# Altium PCB PCB1.PcbDoc
Units mm, origin at the board's own origin, x right, y up, seen from the top; angles counter-clockwise.
Board outline 66.04 x 101.73 mm, 4 copper layers (Top Layer, Int1 (GND), Int2 (PWR), Bottom Layer), stack 1.369 mm thick; 32 components, 67 nets, 162 pads, 41 vias.
Unrouted connection lines stored in the file: 46.
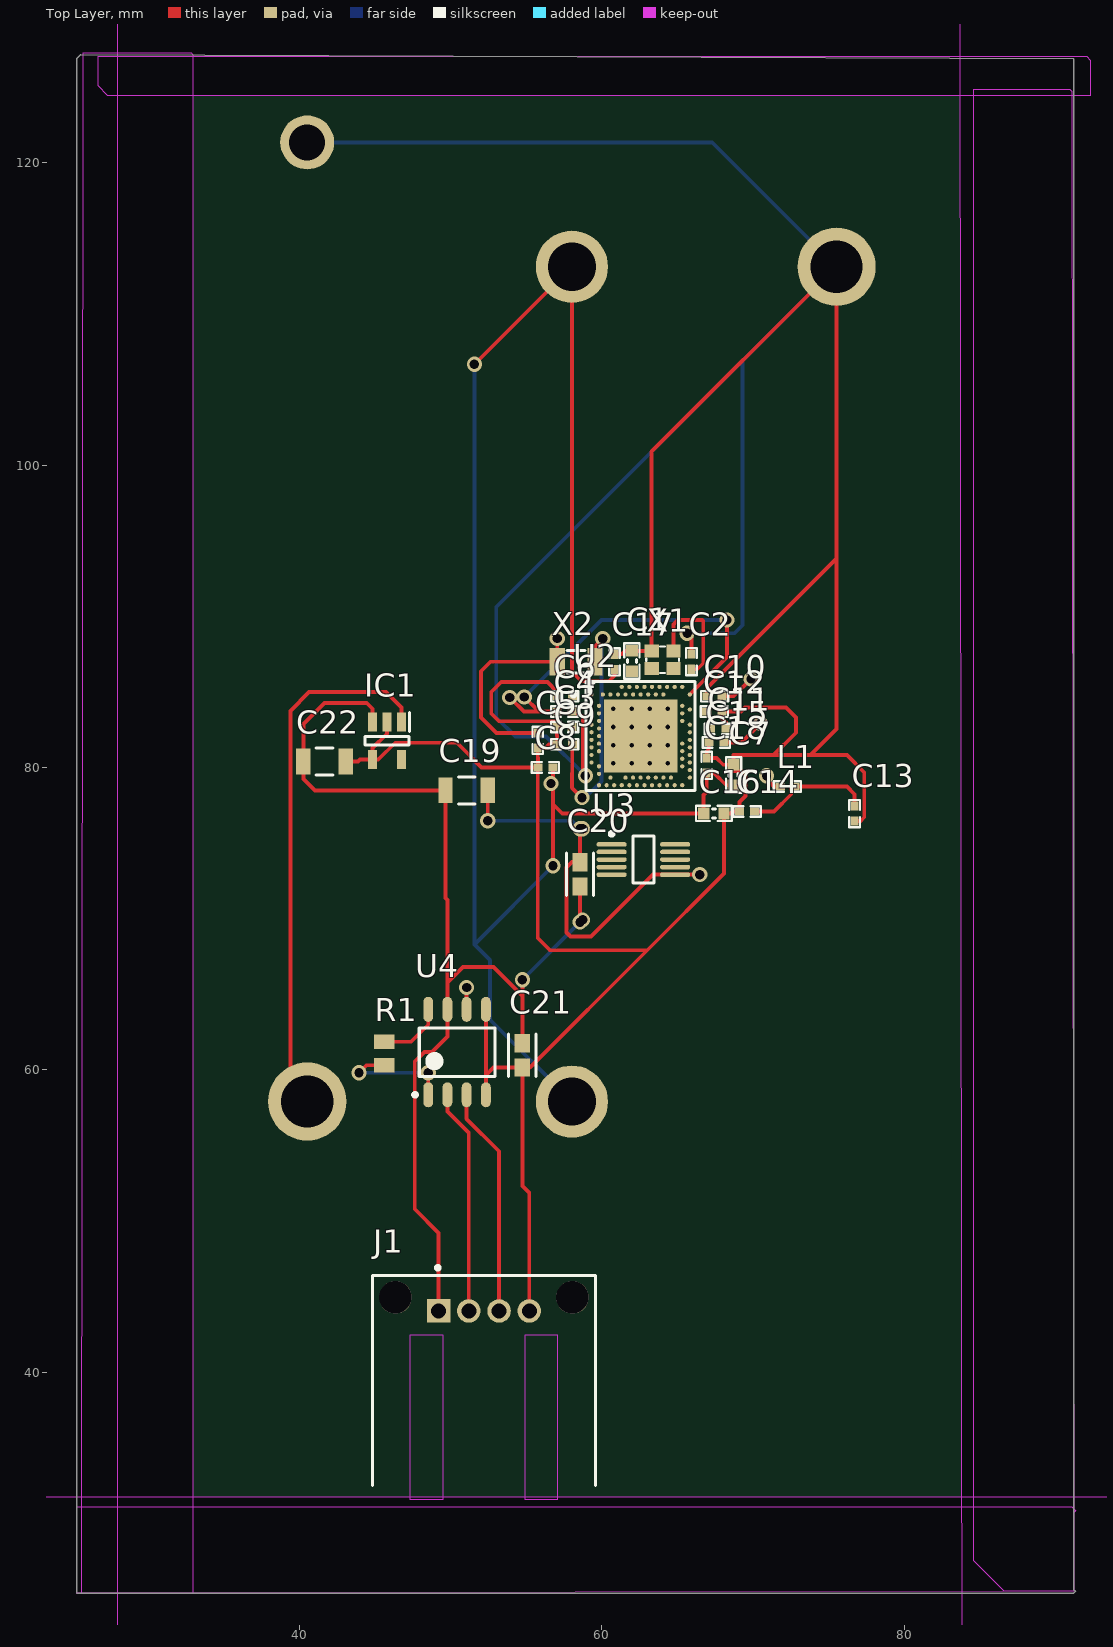
[diagram p0: Top Layer view]
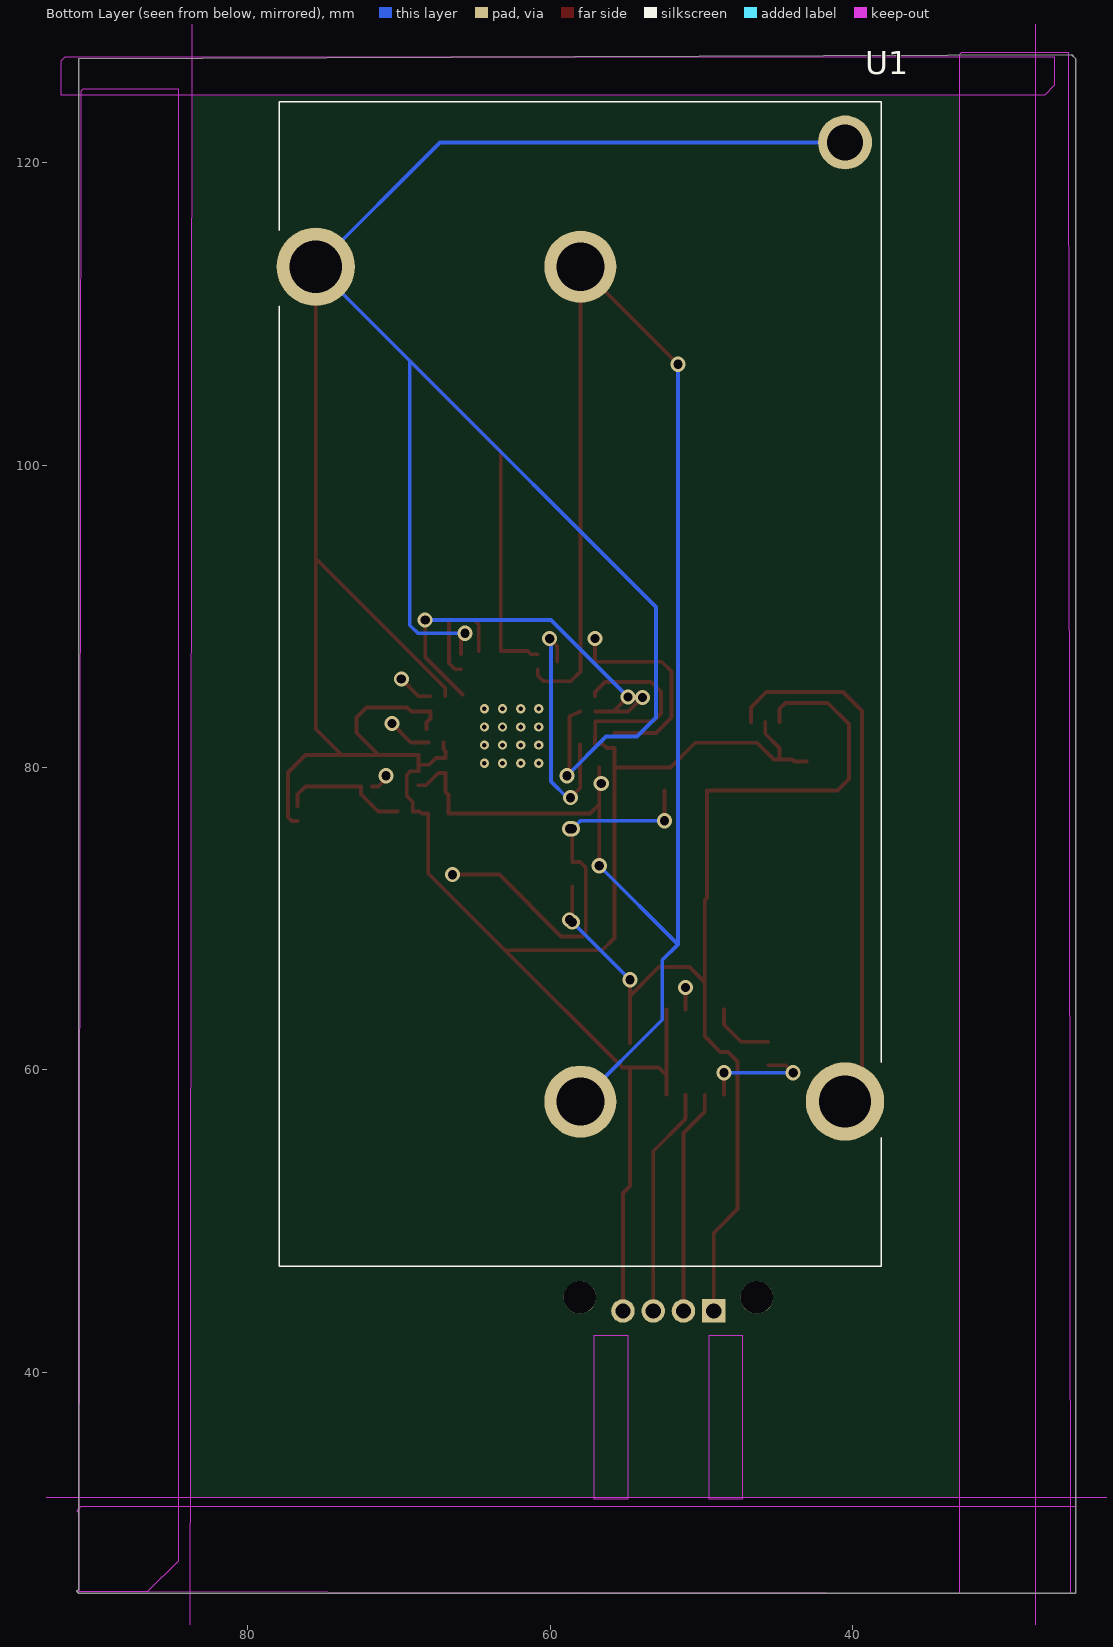
[diagram p1: Bottom Layer view, seen from below]
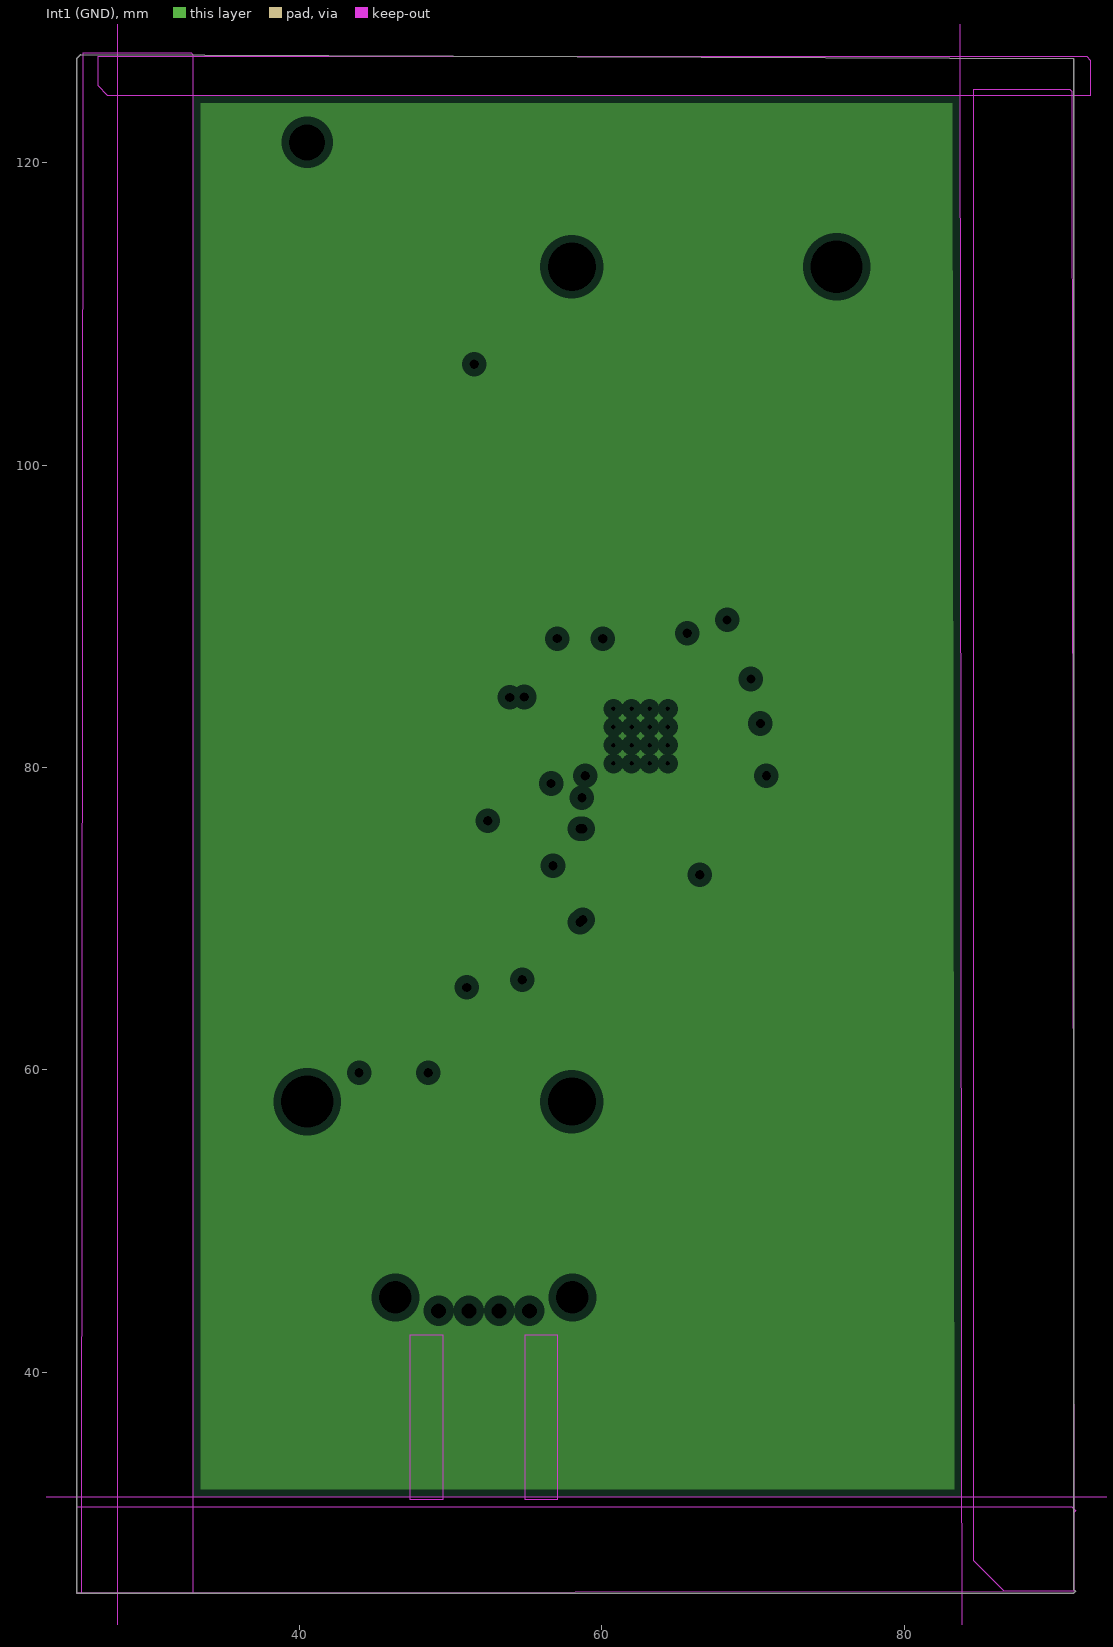
[diagram p2: Int1 (GND), clearances drawn from the general rule]
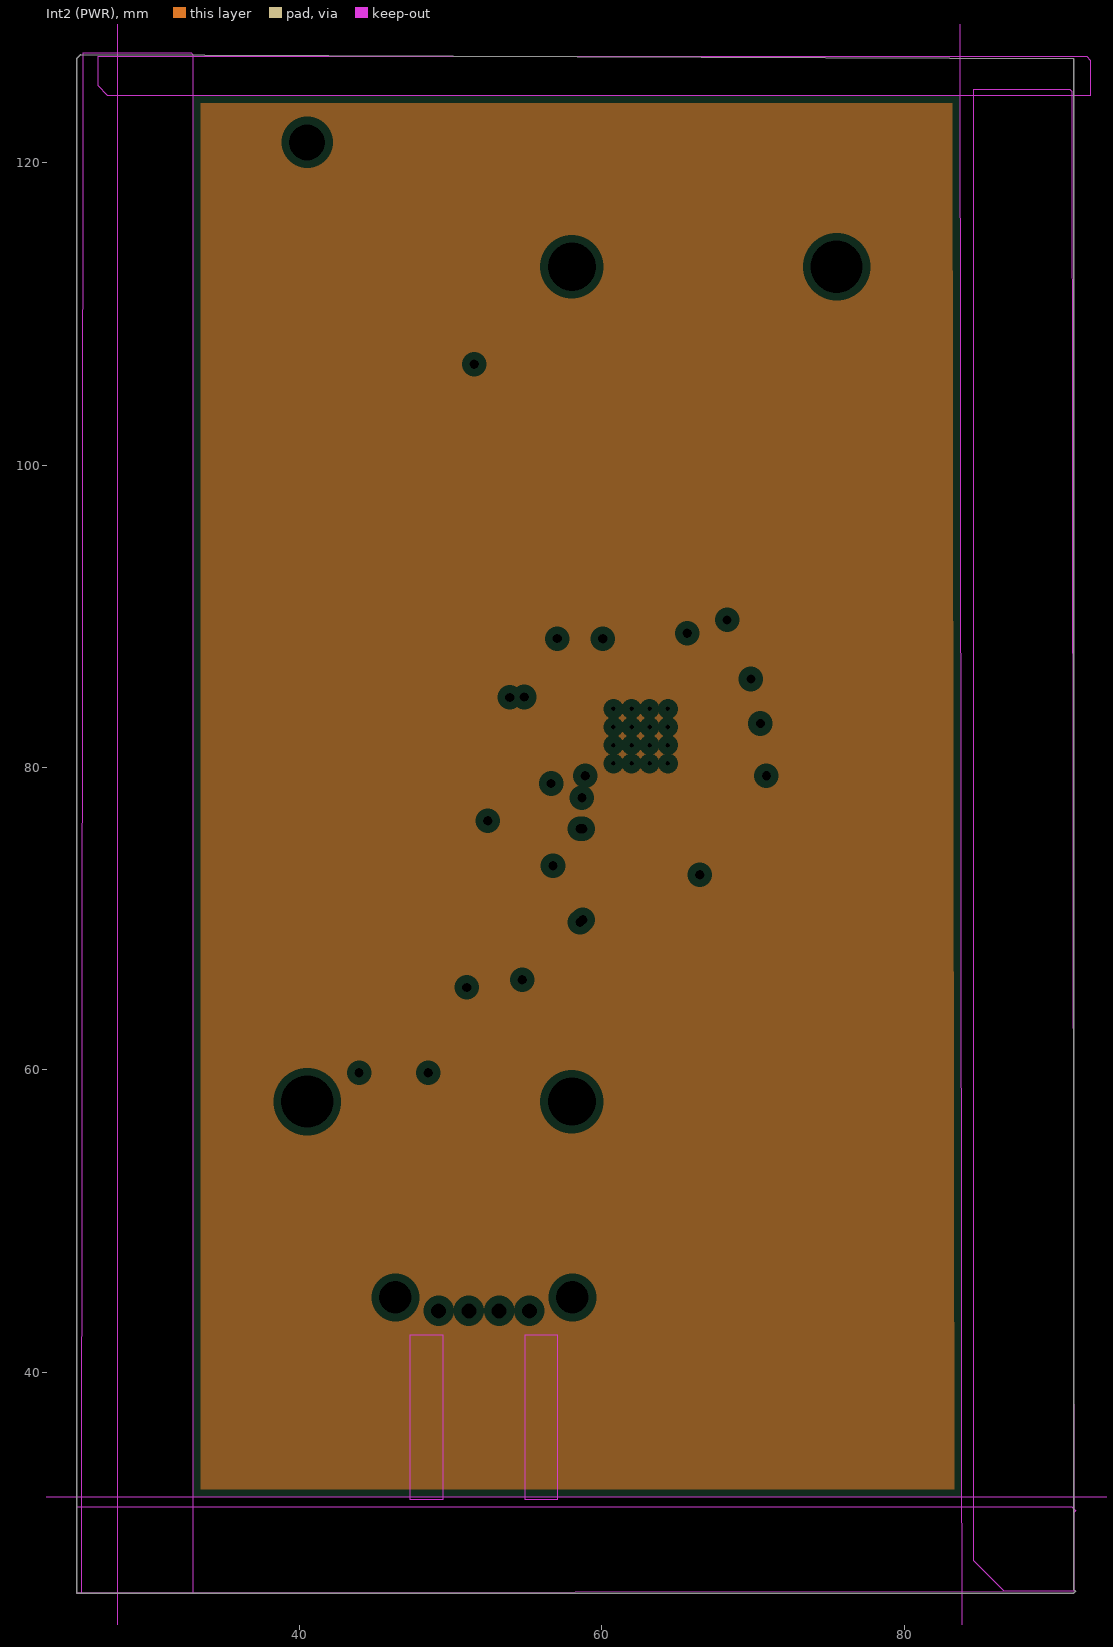
[diagram p3: Int2 (PWR), clearances drawn from the general rule]

## Layer stack, top to bottom
Top Solder: solder mask 0.0254, SM-001, Dk 4
Top Layer: signal copper 0.035
Dielectric 1: prepreg 0.1295, PP-017, Dk 4.3
Dielectric 2: prepreg 0.1295, PP-017, Dk 4.3
Int1 (GND): plane copper 0.035
Dielectric 3: core 0.7112, Core-039, Dk 4.8
Int2 (PWR): plane copper 0.035
Dielectric 4: prepreg 0.1295, PP-017, Dk 4.3
Dielectric 5: prepreg 0.1295, PP-017, Dk 4.3
Bottom Layer: signal copper 0.035
Bottom Solder: solder mask 0.0254, SM-001, Dk 4

## Board outline
91.186,126.873 91.186,25.654 91.313,25.527 91.186,25.4 25.273,25.4 25.273,126.873 25.527,127.127
cut-out: 83.693,130.746 83.82,130.874 95.377,130.874 95.377,18.224 97.79,15.811 97.663,15.684 83.82,15.684
cut-out: 17.78,18.415 99.822,18.415 98.806,19.431 98.806,31.75 18.542,31.75 17.78,32.512
cut-out: 18.034,130.175 18.923,129.286 27.94,129.286 27.94,20.447 28.575,19.812 27.813,19.05 19.939,19.05
cut-out: 25.717,127.254 32.829,127.254 32.956,127.127 32.956,25.4 25.59,25.4
cut-out: 25.273,25.4 25.273,31.115 91.059,31.115 91.313,30.861 91.186,30.734 91.186,25.527
cut-out: 91.186,25.527 86.614,25.527 84.582,27.559 84.582,124.841 90.932,124.841 91.059,124.714
cut-out: 92.329,126.746 92.075,127 26.67,127 26.67,125.095 27.305,124.46 92.329,124.46

## Design rules (kind name [scope] priority, off if disabled: settings)
Clearance [All] p1: gap=0.254 ignorepadtopadclearanceinfootprint=FALSE except(0: Arc-Hole Track-Hole SMDPad-Hole THPad-Hole Via-Hole Fill-Hole Poly-Hole Region-Hole Text-Hole)
PlaneClearance [All] p1: clearance=0.508
PlaneConnect [All] p1: planeconnectstyle=Relief reliefexpansion=0.508 reliefentries=4 reliefconductorwidth=0.254 reliefairgap=0.254
PolygonConnect [All] p1: connectstyle=Relief reliefconductorwidth=0.254 reliefentries=4 polygonreliefangle="90 Angle" airgapwidth=0.254
RoutingVias [All] p1: holewidth=0.611 width=1 viastyle="Through Hole" minholewidth=0.611 minwidth=1 maxholewidth=0.711 maxwidth=1
SolderMaskExpansion [All] p1: expansion=0.102 istentingtop=FALSE
Width [All] p1: maxlimit=0.254 minlimit=0.25 preferedwidth=0.254 minimp=50.000000 maximp=50.000000 favimp=50.000000 checkconnectedcopper=TRUE
28 further rules are at their usual default settings.

## Components (designator, comment, footprint, x,y, rotation, side; value= is the part's Value field where it differs from the comment)
C1 "1.0µF" CAPC1608X06L 61.976,87.035 r270 top
C2 "12pF" CAPC1005X04L 65.913,86.995 r90 top
C3 "N.C." CAPC1005X04L 57.531,82.677 r180 top
C4 "12pF" CAPC1005X04L 57.531,83.693 r0 top
C5 "12pF" CAPC1005X04L 55.753,81.788 r270 top
C6 "100nF" CAPC1005X04L 57.539,84.709 r180 top
C7 "1.0µF" CAPC1608X06L 68.707,79.502 r90 top
C8 "100nF" CAPC1005X04L 56.261,80.01 r180 top
C9 "12pF" CAPC1005X04L 57.539,81.534 r180 top
C10 "100pF" CAPC1005X04L 67.445,84.709 r180 top
C11 "N.C." CAPC1005X04L 67.691,82.55 r180 top
C12 "0.8pF" CAPC1005X04L 67.429,83.693 r180 top
C13 "0.5pF" CAPC1005X04L 76.708,76.954 r90 top
C14 "N.C." CAPC1005X04L 69.596,77.089 r180 top
C15 "820pF" CAPC1005X04L 67.564,81.661 r180 top
C16 "4.7µF" CAPC1608X06L 67.397,76.962 r0 top
C17 "100nF" CAPC1005X04L 60.833,86.987 r90 top
C18 "100nF" CAPC1005X04L 66.929,80.137 r90 top
C19 "0.1uF" FP-C1206C-EB-MFG 51.051,78.486 r0 top value="0.10 μF"
C20 "10uF" FP-GRM188-0_1-e0_2_0_55-IPC_A 58.547,72.938 r90 top
C21 "10uF" FP-GRM188-0_1-e0_2_0_55-IPC_A 54.737,60.96 r270 top
C22 "0.1uF" FP-C1206C-EB-MFG 41.656,80.391 r0 top value="0.10 μF"
IC1 "MAX1726EUK50+T" SOT95P280X145-5N 45.786,81.768 r270 top
J1 "34793-0040" FP-34793-0040-MFG 52.197,37.465 r0 top
L1 "4.7nH" INDC1005X04L 72.263,78.74 r0 top
R1 "303R" RESC2013X70X40LL20T20 45.593,61.087 r90 top
U1 "1047" 1047 58.013,85.512 r90 bottom
U2 "nRF52840-QIAA" AQFN50P700X700X85_HS-74N 62.559,82.078 r0 top
U3 "AD7789BRMZ" RM-10_M 62.738,73.914 r0 top
U4 "AD623ARZ" ADI-AD623ARZ-8_M 50.419,61.183 r90 top
X1 "32MHz" BT-XTAL_2016 64.008,87.122 r0 top
X2 "32.768kHz" XTAL_3215 58.293,86.995 r0 top

## Footprints (in the part's own frame and the unit in brackets; to place one, negate y for a bottom-side part, rotate by r counter-clockwise, add the part's x,y. Pads: shape width x height; smd on the part's side, far side on the other; paste and mask are expansions set on the pad)
1047 [mm]
  round 4.77 hole 3.18: 1(-27.6,0) 2(27.6,0)
  round 5.175 hole 3.45: 3(-27.6,-17.5) 4(27.6,17.5)
  round 3.57 hole 2.38: 5(35.82,-17.5)
  silkscreen extent -38.5,-19.9 38.51,19.9, body extent -38.51,-19.9 38.51,19.9, height 14.95
ADI-AD623ARZ-8_M [mm] "SOIC, 8-Leads, Body 5x4mm, Pitch 1.27mm, IPC Low Density"
  oval 1.65x0.65 smd: 1(-2.825,1.905) 2(-2.825,0.635) 3(-2.825,-0.635) 4(-2.825,-1.905) 5(2.825,-1.905) 6(2.825,-0.635) 7(2.825,0.635) 8(2.825,1.905)
  silkscreen extent -2.95,-2.5 1.6,2.9, body extent -2,-2.5 2,2.5, height 1.75
AQFN50P700X700X85_HS-74N [mm]
  rect 4.85x4.85 smd mask+0.05: 74(0,0)
  round 0.275 smd paste+0.012 mask+0.05: A8(-1.25,3.25) A10(-0.75,3.25) A12(-0.25,3.25) A14(0.25,3.25) A16(0.75,3.25) A18(1.25,3.25) A20(1.75,3.25) A22(2.25,3.25) A23(2.75,3.25) AA24(3.25,-2.25) AB2(-2.75,-2.5) AC5(-2,-2.75) AC9(-1,-2.75) AC11(-0.5,-2.75) AC13(0,-2.75) AC15(0.5,-2.75) AC17(1,-2.75) AC19(1.5,-2.75) AC21(2,-2.75) AC24(3.25,-2.75) AD2(-2.75,-3.25) AD4(-2.25,-3.25) AD6(-1.75,-3.25) AD8(-1.25,-3.25) AD10(-0.75,-3.25) AD12(-0.25,-3.25) AD14(0.25,-3.25) AD16(0.75,-3.25) AD18(1.25,-3.25) AD20(1.75,-3.25) AD22(2.25,-3.25) AD23(2.75,-3.25) B1(-3.25,2.75) B3(-2.5,2.75) B5(-2,2.75) B7(-1.5,2.75) B9(-1,2.75) B11(-0.5,2.75) B13(0,2.75) B15(0.5,2.75) B17(1,2.75) B19(1.5,2.75) B24(3.25,2.75) C1(-3.25,2.25) D2(-2.75,2) D23(2.75,2) E24(3.25,1.75) F2(-2.75,1.5) F23(2.75,1.5) G1(-3.25,1.25) H2(-2.75,1) H23(2.75,1) J1(-3.25,0.75) J24(3.25,0.75) K2(-2.75,0.5) L1(-3.25,0.25) L24(3.25,0.25) M2(-2.75,0) N1(-3.25,-0.25) N24(3.25,-0.25) P2(-2.75,-0.5) P23(2.75,-0.5) R1(-3.25,-0.75) R24(3.25,-0.75) T2(-2.75,-1) T23(2.75,-1) U1(-3.25,-1.25) U24(3.25,-1.25) V23(2.75,-1.5) W1(-3.25,-1.75) W24(3.25,-1.75) Y2(-2.75,-2) Y23(2.75,-2)
  silkscreen extent -4.56,-3.6 3.6,3.6, body extent -3.55,-3.55 3.55,3.55, height 0.85
BT-XTAL_2016 [mm]
  rect 0.95x0.85 smd: 1(-0.725,-0.575) 2(0.725,-0.575) 3(0.725,0.575) 4(-0.725,0.575)
  silkscreen extent -1.08,-0.88 1.08,0.88, body extent -1.05,-0.85 1.05,0.85, height 0.56
CAPC1005X04L [mm]
  rect 0.6x0.5 smd: 1(-0.5,0) 2(0.5,0)
  silkscreen extent -0.9,-0.35 0.9,0.35, body extent -0.51,-0.25 0.51,0.25, height 0.5
CAPC1608X06L [mm]
  rect 0.75x0.8 smd: 1(-0.675,0) 2(0.675,0)
  silkscreen extent -1.17,-0.5 1.18,0.5, body extent -0.8,-0.43 0.8,0.43, height 0.8
FP-34793-0040-MFG [mm]
  rect 1.55x1.55 hole 1 paste-1000 mask+0: 1(-3,6.6)
  round 1.55 hole 1 paste-1000 mask+0: 2(-1,6.6) 3(1,6.6) 4(3,6.6)
  round 2.15 hole 2.15 unplated paste-1000 mask+0: ""(-5.85,7.5) ""(5.85,7.5)
  Keep-Out Layer region: 2.69,-5.85 4.89,-5.85 4.89,5 2.69,5
  Keep-Out Layer region: -4.89,-5.85 -2.69,-5.85 -2.69,5 -4.89,5
  silkscreen extent -7.37,-4.95 7.37,9.57, body extent -7.47,-9.05 7.47,9.05, height 0.25
FP-C1206C-EB-MFG [mm]
  rect 0.95x1.7 smd paste+0 mask+0: 1(-1.4,0) 2(1.4,0)
  silkscreen extent -0.55,-0.9 0.55,0.9, body extent -2,-1 2,1, height 0.25
FP-GRM188-0_1-e0_2_0_55-IPC_A [mm]
  rect 1.208x1.012 smd paste+0 mask+0: 1(-0.802,0) 2(0.802,0)
  silkscreen extent -1.41,-0.91 1.41,0.91, body extent -1.91,-1.01 1.91,1.01, height 0.25
INDC1005X04L [mm]
  rect 0.65x0.5 smd: 1(-0.475,0) 2(0.475,0)
  silkscreen extent -0.9,-0.35 0.9,0.35, body extent -0.5,-0.3 0.5,0.3, height 0.5
RESC2013X70X40LL20T20 [mm] "Chip Resistor, 2-Leads, Body 2.00x1.25mm, IPC High Density"
  rect 0.95x1.35 smd: 1(-0.775,0) 2(0.775,0)
  body extent -1.1,-0.72 1.1,0.72, height 0.7
RM-10_M [mm] "TSSOP, 10-Leads, Body 3x3mm, Pitch 0.5mm, IPC Low Density"
  oval 2x0.3 smd: 1(-2.1,1) 2(-2.1,0.5) 3(-2.1,0) 4(-2.1,-0.5) 5(-2.1,-1) 6(2.1,-1) 7(2.1,-0.5) 8(2.1,0) 9(2.1,0.5) 10(2.1,1)
  silkscreen extent -2.22,-1.55 0.7,1.82, body extent -1.55,-1.55 1.55,1.55, height 1.1
SOT95P280X145-5N [mm]
  rect 1.25x0.6 smd: 1(-1.25,0.95) 2(-1.25,0) 3(-1.25,-0.95) 4(1.25,-0.95) 5(1.25,0.95)
  silkscreen extent -1.87,-1.45 0.27,1.5, body extent -1.4,-1.45 1.4,1.45, height 1.45
XTAL_3215 [mm]
  rect 1x1.8 smd: 1(-1.25,0) 2(1.25,0)
  silkscreen extent -0.6,-0.75 0.6,0.75, body extent -1.6,-0.75 1.6,0.75, height 0.81

## Part data
C1 C7: library part C0603-1µ0, "Capacitor, X7R, ±10%", Footprint Doc=0603, LatestRevisionDate=2013-06-05, Note=16V, Part Number=C0603-1µ0, Pin Count=2, Published=2009-05-08, Publisher="Nordic Semiconductor"
C2 C4 C5 C9: library part C0402-12p, "Capacitor, NP0, ±2%", Footprint Doc=0402, LatestRevisionDate=2011-05-11, Note=50V, Part Number=C0402-12p, Pin Count=2, Published=2009-05-08, Publisher="Nordic Semiconductor"
C3 C11 C14: library part C0402-N.C., "Not mounted", Assembly="Not mounted", Footprint Doc=0402, LatestRevisionDate=2009-05-08, Part Number=C0402-N.C., Pin Count=2, Published=2009-05-08, Publisher="Nordic Semiconductor"
  C14: Note="Chip Cap"
C6 C8 C17 C18: library part C0402-100n, "Capacitor, X7R, ±10%", Footprint Doc=0402, LatestRevisionDate=2009-11-23, Note=16V, Part Number=C0402-100n, Pin Count=2, Published=2009-05-08, Publisher="Nordic Semiconductor"
C10: library part C0402-100p, "Capacitor, NP0, ±5%", Footprint Doc=0402, LatestRevisionDate=2009-05-08, Note=50V, Part Number=C0402-100p, Pin Count=2, Published=2009-05-08, Publisher="Nordic Semiconductor"
C12: library part C0402-0.8p, "Capacitor, NP0, ±10%", Footprint Doc=0402, LatestRevisionDate=2012-11-21, Note=50V, Part Number=C0402-0.8p, Pin Count=2, Published=2009-05-08, Publisher="Nordic Semiconductor"
C13: library part C0402-0.5p, "Capacitor, NP0, ±10%", Footprint Doc=0402, LatestRevisionDate=2017-02-23, Note=50V, Part Number=C0402-0.5p, Pin Count=2, Published=2009-05-08, Publisher="Nordic Semiconductor"
C15: library part C0402-820p, "Capacitor, NP0, ±5%", Footprint Doc=0402, LatestRevisionDate=2009-05-08, Note=50V, Part Number=C0402-820p, Pin Count=2, Published=2009-05-08, Publisher="Nordic Semiconductor"
C16: library part C0603-4µ7-6.3V-X7R, "Capacitor, X7R, ±10%", Footprint Doc=0603, LatestRevisionDate=2015-06-10, Note=6.3V, Part Number=C0603-4µ7-6.3V-X7R, Pin Count=2, Published=2015-06-10, Publisher="Nordic Semiconductor"
C19 C22: library part CMP-03020-000153-1, "CAP CER 0.1UF 100V X7R 1206", Capacitance="0.10 μF", Manufacturer=KEMET, Manufacturer Part Number=C1206C104K1RACTU, Package=C1206C-EB, Temperature="-55°C to +150°C", Temperature Characteristic=X7R, Temperature Coefficient=15%, Temperature Range High=+150°C, Temperature Range Low=-55°C, Tolerance=0.1, Voltage Rating="100 V", Automotive=Yes, Automotive Grade="Grade 0", Category=Cap, ComponentLink2Description=Datasheet, ComponentLink2URL=https://content.kemet.com/datasheets/KEM_C1007_X8R_ULTRA_150C_SMD.pdf, Device Class L1="Passive Components", Device Class L2=Capacitors, Device Class L3="Ceramic Capacitors", Digikey Description="CAP CER 0.1UF 100V X7R 1206", Height=0.88mm, Ipc Land Pattern Name=CAPC320160X78, Lead Free=Yes, Material=Ceramic, Mouser Description="CAP CER 0.1UF 100V X7R 1206", Octopart=https://octopart.com/c1206c104k1ractu-kemet-89521, RoHS=TRUE
C20 C21: library part CMP-2006-02792-2, "Chip Multilayer Ceramic Capacitors for General Purpose, 0603, 10uF, X5R, 15%, 20%, 6.3V", Case Code (Imperial)=0603, Case Code (Metric)=1608, Dielectric=X5R, Max Operating Temperature=85°C, Min Operating Temperature=-55°C, Package Quantity=4000, Tolerance=20%, Voltage=6.3V, Capacitance=10uF, Case/Package=0603, Depth=0.8mm, Height=0.8mm, Lead Free="Lead Free", Length=1.6mm, Material=Ceramic, Mount="Surface Mount", Packaging="Tape and Reel", Radiation Hardening=No, REACH SVHC="No SVHC", Termination=SMD/SMT, Thickness=0.035inch, Voltage Rating=6.3V, Voltage Rating (DC)=6.3V, Width=0.031inch
IC1: "Integrated Circuit", Manufacturer_Name="Maxim Integrated", Mouser Part Number=700-MAX1726EUK50T, Datasheet Link=http://componentsearchengine.com/Datasheets/1/MAX1726EUK50+T.pdf, Height=1.45mm, Manufacturer_Part_Number=MAX1726EUK50+T, Mouser Price/Stock=https://www.mouser.co.uk/ProductDetail/Maxim-Integrated/MAX1726EUK50%2bT?qs=Jw2w9zrI6w%252Bbrdx6zz2S%2FQ%3D%3D
J1: library part CMP-04776-000092-1, "CONN HEADER R/A 4POS 2MM", Current Rating=4A, Manufacturer=Molex, Temperature="-40°C to +105°C", Temperature Range High=+105°C, Temperature Range Low=-40°C, Voltage Rating=500V, Automotive=No, Category=Conn, ComponentLink2Description=Datasheet, ComponentLink2URL=http://www.molex.com/webdocs/datasheets/pdf/en-us/0347930040_PCB_HEADERS.pdf, Conn Gender=Male, Conn Orientation="Right Angle", Contact Material=Tin,Nickel, Device Class L1=Connectors, Device Class L2="Headers and Wire Housings", Device Class L3=unset, Digikey Description="CONN HEADER R/A 4POS 2MM", Footprint Url=https://www.molex.com/pdm_docs/sd/347930040_sd.pdf, Height=10.02mm, Lead Free=Yes, Manufacturer Part Number=34793-0040, Mouser Description="Mini50™ Unsealed, Single Row, Right-Angle Header, 4 Circuit, Polarization Option A, Black, Tray", Number Of Contacts=4, Number Of Rows=1, Octopart=https://octopart.com/34793-0040-molex-22881898, Package=34793-0040, Pitch=2mm, RoHS=TRUE, Standoff Height=0.32mm
L1: library part L0402-4n7, "High frequency chip inductor ±5%", Footprint Doc=0402, LatestRevisionDate=2012-09-19, Note="High frequency chip inductor ±5%", Part Number=L0402-4n7, Pin Count=2, Published=2009-05-08, Publisher="Nordic Semiconductor"
R1: library part CMP-2001-00412-1, Manufacturer=Panasonic, Part Number=ERJ-6GEYJ3R0V
U1: "Undefined or Miscellaneous", Manufacturer_Name="Keystone Electronics", Mouser Part Number=534-1047, Datasheet Link=https://www.keyelco.com/product.cfm/product_id/14061, Height=14.85mm, Manufacturer_Part_Number=1047, Mouser Price/Stock=https://www.mouser.co.uk/ProductDetail/Keystone-Electronics/1047?qs=up89fPMRNqBQruBm7zqCRQ%3D%3D
U2: library part nRF52840-QIAAD0, "Multi-protocol Bluetooth Low Energy, IEEE 802.15.4, ANT and 2.4GHz proprietary system-on-chip", Manufacturer="Nordic Semiconductor", Footprint Doc=AQFN-73, LatestRevisionDate=2018-12-04, Manufacturer Part Number=nRF52840-QIAAD0, Part Number=nRF52840-QIAAD0, Pin Count=73, Published=2018-12-04, Publisher="Nordic Semiconductor"
U3: library part CMP-0313-02267-2, "Single 24-Bit Low Power Sigma-Delta Analog-to-Digital Converter with Serial, SPI Interface, 16.6SPS, -40 to +105 degC, RM-10, Pb-Free, Tube", Generic Part Number=AD7789, Housing Color=Natural, Manufacturer="Analog Devices", Manufacturer Part Number=46999-0353, Max Operating Temperature=105°C, Min Operating Temperature=-40°C, Category=Connectors, Channels=1, ComponentLink1Description="Manufacturer URL", ComponentLink1URL=http://www.analog.com/en/index.html, ComponentLink2Description=Datasheet, ComponentLink2URL=http://www.analog.com/static/imported-files/data_sheets/AD7788_7789.pdf, ComponentLink3Description="Package Specification", ComponentLink3URL=http://www.analog.com/static/imported-files/packages/PKG_PDF/MSOP%28RM%29/RM_10.pdf, ComponentLink4Description="Product URL", ComponentLink4URL=http://www.analog.com/en/analog-to-digital-converters/ad-converters/ad7789/products/product.html, ComponentLink5Description=https://datasheet.ciiva.com/30086/050291758-sd-30086280.pdf?src-supplier=Onlinecomponents.com, ComponentLink5URL=https://datasheet.ciiva.com/30086/050291758-sd-30086280.pdf?src-supplier=Onlinecomponents.com, DatasheetVersion=Rev.B, Gender=Male, Glow Wire Compliant=Compliant, Housing Material=Nylon, Interface="Ser, SPI", Length=18.6mm, Mount=Cable, Mounting Technology="Surface Mount", Number Of Contacts=4, Orientation=Straight, PackageDescription="10-Lead Mini Small Outline Package [MSOP]", PackageReference=RM-10, PackageVersion=May-2005, Packing=Tube, PartNumber=AD7789BRMZ, Pitch=3.68mm, Pricing 1="1=0,85000, 10=0,70300, 100=0,58600, 1000=0,46880, 2500=0,42485 (USD)", REACH SVHC="No SVHC", Resolution (Bits)=24, RoHS=Y, Stock 1=6500, Supplier 1=Digi-Key, Throughput Rate (SPS)=16.6
U4: library part CMP-2000-05040-1, "Single-Supply, Rail-to-Rail, Low Cost Instrumentation Amplifier, 800 KHz, -40 to 85 degC, 8-Pin SOIC, RoHS, Tube", Current - Input Bias=17nA, Current - Output / Channel=-, Current - Supply=375µA, Manufacturer="Analog Devices", Operating Temperature=-40degC~85degC, Package / Case="8-SOIC(0.154\",3.90mmWidth)", Standard Package=98, Supplier Device Package=8-SOIC, Voltage - Input Offset=25µV, Voltage - Supply, Single/Dual (±)=2.7V~12V,±2.5V~6V, -3db Bandwidth=800kHz, Amplifier Type=Instrumentation, Category=IntegratedCircuits(ICs), Datasheet URL=https://datasheet.ciiva.com/20167/82-1224-20167284.pdf, Datasheet Version="Rev. D, 07/2008", EDA / CAD Models=DownloadfromAcceleratedDesigns, Family=Linear-Amplifiers-Instrumentation,OPAmps,BufferAmps, Gain Bandwidth Product=-, Manufacturer URL=http://www.analog.com/, Mfg Application Notes=Electrocardiogram(ECG)Solutions, Mounting Type=SurfaceMount, Number of Circuits=1, Online Catalog=Instrumentation, Output Type=Rail-to-Rail, Packaging=Tube, PCN Design/Specification=AD623PolymideThickness02/Oct/2013AD623PolymideThickness15/Oct/2013, Product Training Modules=InstrumentationAmplifiersPerformanceCommonPhotodiodeOp-AmpCircuitProblemsandSolutionsIndirectCurrentFeedbackInstrumentationAmplifierApplicationsGuide, Series=-, Slew Rate=0.3V/µs
X1: library part XTAL_SMD2016_32MHz_8pF_General, "XTAL SMD 2016, 32MHz, Cl=8pF, Total Tol: ±40ppm", Footprint Doc=XTAL_2016, LatestRevisionDate=2016-08-19, Part Number=XTAL_SMD2016_32MHz_8pF_General, Pin Count=4, Published=2016-08-19, Publisher="Nordic Semiconductor"
X2: library part XTAL_SMD3215_32.768kHz_9pF_General, "XTAL SMD 3215, 32.768kHz, Cl=9pF, Total Tol: ±50ppm", Footprint Doc=XTAL_3215, LatestRevisionDate=2016-08-19, Part Number=XTAL_SMD3215_32.768kHz_9pF_General, Pin Count=2, Published=2016-08-19, Publisher="Nordic Semiconductor"

## Via types
v1: diameter 1, hole 0.611, Top Layer to Bottom Layer, 25 vias
v2: diameter 0.61, hole 0.305, Top Layer to Bottom Layer, 16 vias

## Nets (pads, with @x,y where several pads share a name; then routed paths per layer and width w, separated by ;. In a path a pad name is that pad's centre, name@x,y a point inside that pad or via, vN(x,y) a via of type N, cw(c..) or ccw(c..) an arc to the next point about the centre after c; other vN are vias at no path point)
DEC1: C6.1 U2.C1
DEC3: C10.1 U2.D23 | length 2.4
  Top Layer w0.254: C10.1 68.707,84.709 v1(69.85,85.852)
DEC4_6: C1.2 C11.2 U2.B5 U2.E24
GND: C1.1 C2.2 C3.2 C4.2 C5.2 C6.2 C7.2 C8.2 C9.2 C10.2 C11.1 C12.1 C13.1 C14.2 C15.2 C16.2 C17.2 C18.2 C21.2 C22.2 IC1.2 IC1.4 J1.4 U1.4 U1.5 U2.74 U2.AD2 U2.B7 U2.F23 U4.4 U4.5 X1.2 X1.4 | length 320.6
  Top Layer w0.254: C22.2 43.866,80.391 43.993,80.518 IC1.4 ; IC1.2 45.786,82.23 44.836,81.28 IC1.4 ; U4.4 52.324,59.65 ; U4.5 52.324,59.65 ; J1.4 55.197,51.867 54.737,52.327 C21.2 ; C6.2 57.039,84.998 56.388,85.649 53.34,85.649 52.68,84.988 52.68,83.566 53.188,83.058 57.031,83.058 C3.2 57.031,82.101 57.039,82.093 C9.2 56.507,81.534 56.261,81.288 C5.2 55.753,80.653 55.761,80.645 C8.2 C8.2@55.753,80.01 ; C4.2 58.725,83.388 58.725,79.629 v1(58.903,79.451) ; C17.2 61.29,87.487 61.513,87.71 C1.1 62.611,87.71 62.624,87.697 X1.4 63.283,100.882 U1.4 75.513,93.814 ; v1(65.634,88.875) 65.913,88.595 C2.2 ; C10.2 66.945,85.246 75.513,93.814 ; C15.2 67.064,81.212 66.929,81.077 C18.2 67.564,80.637 68.024,80.177 C7.2 ; C11.1 68.191,82.982 67.929,83.244 C12.1 69.19,83.693 69.469,83.972 72.161,83.972 72.822,83.312 72.822,82.296 71.349,80.823 ; C13.1 77.089,76.454 77.343,76.708 77.343,79.68 76.2,80.823 73.787,80.823 ; IC1.4 45.212,80.518 46.33,81.636 50.419,81.636 52.045,80.01 C8.2@55.753,80.01 ; 52.324,59.65 52.832,60.158 C21.2 ; C21.2 55.231,60.158 62.992,67.92 ; C8.2@55.753,80.01 55.753,68.732 56.566,67.92 62.992,67.92 ; 62.992,67.92 68.072,73 C16.2 68.504,76.962 68.631,77.089 C14.2 69.096,77.724 69.494,78.122 69.494,79.502 69.24,79.756 68.707,79.756 C7.2 ; C7.2 68.707,80.823 71.349,80.823 ; 71.349,80.823 73.787,80.823 ; 73.787,80.823 75.513,82.549 75.513,93.814
  Bottom Layer w0.254: U1.5 67.293,121.332 U1.4 69.291,106.89 ; v1(58.903,79.451) 56.312,82.042 54.28,82.042 53.01,83.312 53.01,90.609 69.291,106.89 ; v1(65.634,88.875) 68.758,88.875 69.291,89.408 69.291,106.89
  other v2: 60.759,80.278 61.959,80.278 63.159,80.278 64.359,80.278 60.759,81.478 61.959,81.478 63.159,81.478 64.359,81.478 60.759,82.678 61.959,82.678 63.159,82.678 64.359,82.678 60.759,83.878 61.959,83.878 63.159,83.878 64.359,83.878
NetC3_1: C3.1 U2.A18
NetC12_2: C12.2 L1.1 U2.H23 | length 1.3
  Top Layer w0.254: v1(70.874,79.451) 70.874,79.248 71.382,78.74 L1.1
NetC15_1: C15.1 U2.N24 | length 2.9
  Top Layer w0.254: C15.1 69.233,81.661 v1(70.477,82.906)
NetC19_2: C19.2 C20.2 U3.4 U3.6 U3.7 | length 26.6
  Top Layer w0.254: v1(52.451,76.479) C19.2 ; v1(58.725,75.949) v1(58.547,75.946) C20.2 58.017,73.74 57.658,73.381 57.658,69.088 57.912,68.834 59.284,68.834 63.364,72.914 U3.6 v1(66.465,72.914)
  Bottom Layer w0.254: v1(52.451,76.479) 58.014,76.479 v1(58.547,75.946)
NetJ1_2: J1.2 U4.2 | length 14.9
  Top Layer w0.254: U4.2 49.784,57.252 51.197,55.839 J1.2
NetJ1_3: J1.3 U4.3 | length 15.2
  Top Layer w0.254: U4.3 51.054,56.769 53.197,54.626 J1.3
NetR1_1: R1.1 U4.1 | length 7.9
  Top Layer w0.254: v1(43.942,59.817) 44.437,60.312 R1.1 ; U4.1 v1(48.514,59.817)
  Bottom Layer w0.254: v1(43.942,59.817) v1(48.514,59.817)
NetR1_2: R1.2 U4.8 | length 4.4
  Top Layer w0.254: R1.2 47.384,61.862 48.514,62.992 U4.8
NetU2_AC15: U2.AC15 U3.1
NetU2_AC17: U2.AC17 U3.10
NetU3_3: U3.3 U4.6 | length 1.5
  Top Layer w0.254: U4.6 v1(51.054,65.46)
P0.00/XL1: C5.1 U2.D2 X2.1 | length 14.1
  Top Layer w0.254: C5.1 53.018,82.288 51.994,83.312 51.994,86.36 52.629,86.995 X2.1 v1(57.043,88.522)
P0.01/XL2: C9.1 U2.F2 X2.2 | length 17.5
  Top Layer w0.254: C9.1 58.039,79.629 58.022,79.612 58.022,78.656 v1(58.674,78.003) ; X2.2 59.543,88.014 ; v1(60.046,88.519) 59.543,88.016 59.543,88.014 ; v1(60.051,88.522) 59.543,88.014
  Bottom Layer w0.254: v1(58.674,78.003) 58.884,78.003 59.966,79.085 59.966,88.439 v1(60.046,88.519)
P0.02/AIN0: U2.A12
P0.03/AIN1: U2.B13
P0.04/AIN2: U2.J1
P0.05/AIN3: U2.K2
P0.06: U2.L1
P0.07: U2.M2
P0.08: U2.N1
P0.09/NFC1: U2.L24
P0.10/NFC2: U2.J24
P0.11: U2.T2
P0.12: U2.U1
P0.13: U2.AD8
P0.14: U2.AC9
P0.15: U2.AD10
P0.16: U2.AC11
P0.17: U2.AD12 U3.2
P0.20: U2.AD16
P0.23: U2.AC19 U3.9
P0.24: U2.AD20
P0.25: U2.AC21
P0.26: U2.G1
P0.27: U2.H2
P0.28/AIN4: U2.B11
P0.29/AIN5: U2.A10
P0.30/AIN6: U2.B9
P0.31/AIN7: IC1.5 U2.A8
P1.00: U2.AD22
P1.01: U2.Y23
P1.02: U2.W24
P1.03: U2.V23
P1.04: U2.U24
P1.05: U2.T23
P1.06: U2.R24
P1.07: U2.P23
P1.08: U2.P2
P1.09: U2.R1
P1.10: U2.A20
P1.11: U2.B19
P1.12: U2.B17
P1.13: U2.A16
P1.14: U2.B15
P1.15: U2.A14
RF: C13.2 C14.1 L1.2 | length 8.6
  Top Layer w0.254: C14.1 71.374,77.089 72.517,78.232 72.517,78.74 L1.2 76.2,78.74 76.708,78.232 C13.2
SWDCLK: U2.AA24
SWDIO: U2.AC24
VCC_5V: C19.1 C20.1 C21.1 C22.1 IC1.3 J1.1 U3.5 U3.8 U4.7 | length 74.2
  Top Layer w0.254: IC1.3 44.836,83.884 44.45,84.27 41.656,84.27 40.256,82.87 C22.1 40.256,79.248 41.018,78.486 C19.1 49.651,71.38 49.784,71.247 49.784,65.786 ; J1.1 49.197,49.228 47.625,50.8 47.625,60.554 48.26,61.189 48.768,61.189 49.784,62.205 U4.7 49.784,65.786 ; C21.1 54.737,64.897 ; v1(54.737,65.964) 54.737,64.897 ; v1(58.547,69.774) v1@58.547,70.104 ; C20.1 v1@58.547,70.104 ; v1(58.725,69.927) v1@58.547,70.104 ; 49.784,65.786 50.8,66.802 52.832,66.802 54.737,64.897
  Bottom Layer w0.254: v1(54.737,65.964) v1(58.547,69.774)
VCC_7,2V: IC1.1 U1.3 | length 35.5
  Top Layer w0.254: U1.3 39.395,59.03 39.395,83.744 40.64,84.988 45.72,84.988 46.736,83.972 IC1.1
VDD_nRF: C7.1 C8.1 C16.1 C17.1 C18.1 U1.1 U1.2 U2.A22 U2.AD14 U2.AD23 U2.B1 U2.W1 U2.Y2 | length 120.1
  Top Layer w0.254: v1(51.562,106.661) U1.2 58.013,86.335 58.649,85.7 60.452,85.7 60.833,86.081 C17.1 ; v1(56.634,78.943) v1@56.761,79.07 ; v1(56.761,73.5) 56.761,77.572 ; C8.1 v1@56.761,79.07 ; C7.1 68.222,78.827 67.412,79.637 C18.1 66.929,78.388 66.722,78.181 C16.1 57.371,76.962 56.761,77.572 ; 56.761,77.572 56.761,78.943 v1@56.761,79.07
  Bottom Layer w0.254: v1(51.562,106.661) 51.562,68.301 ; v1(56.761,73.5) 51.562,68.301 ; U1.1 52.603,63.322 52.603,67.259 51.562,68.301
XC1: C4.1 U2.B24 X1.1 | length 26.4
  Top Layer w0.254: v1(53.907,84.633) 54.846,83.693 55.829,83.693 ; v1(54.864,84.658) 55.829,83.693 ; C4.1 55.829,83.693 ; U2.B24 68.275,87.294 v1(68.275,89.757)
  Bottom Layer w0.254: v1(54.864,84.658) 59.963,89.757 v1(68.275,89.757)
XC2: C2.1 U2.A23 X1.3 | length 7.6
  Top Layer w0.254: X1.3 64.733,89.466 65.024,89.757 66.632,89.757 66.7,89.689 66.7,86.893 66.302,86.495 C2.1
pads on no net: J1. U2.AB2 U2.AC5 U2.AC13 U2.AD4 U2.AD6 U2.AD18 U2.B3

## Polygon pours and split planes (outlines as drawn)
no net on Int1 (GND) (split plane): 83.291,32.26 33.467,32.26 33.467,123.95 83.19,123.95
no net on Int2 (PWR) (split plane): 83.291,32.26 33.467,32.26 33.467,123.95 83.19,123.95